# Altium PCB WX0.012.445-4.1.PcbDoc
Units mil, origin at the board's own origin, x right, y up, seen from the top; angles counter-clockwise.
Board outline 2410.03 x 1540.03 mil, 2 copper layers (Top Layer, Bottom Layer); 4 components, 13 nets, 38 pads, 111 vias.
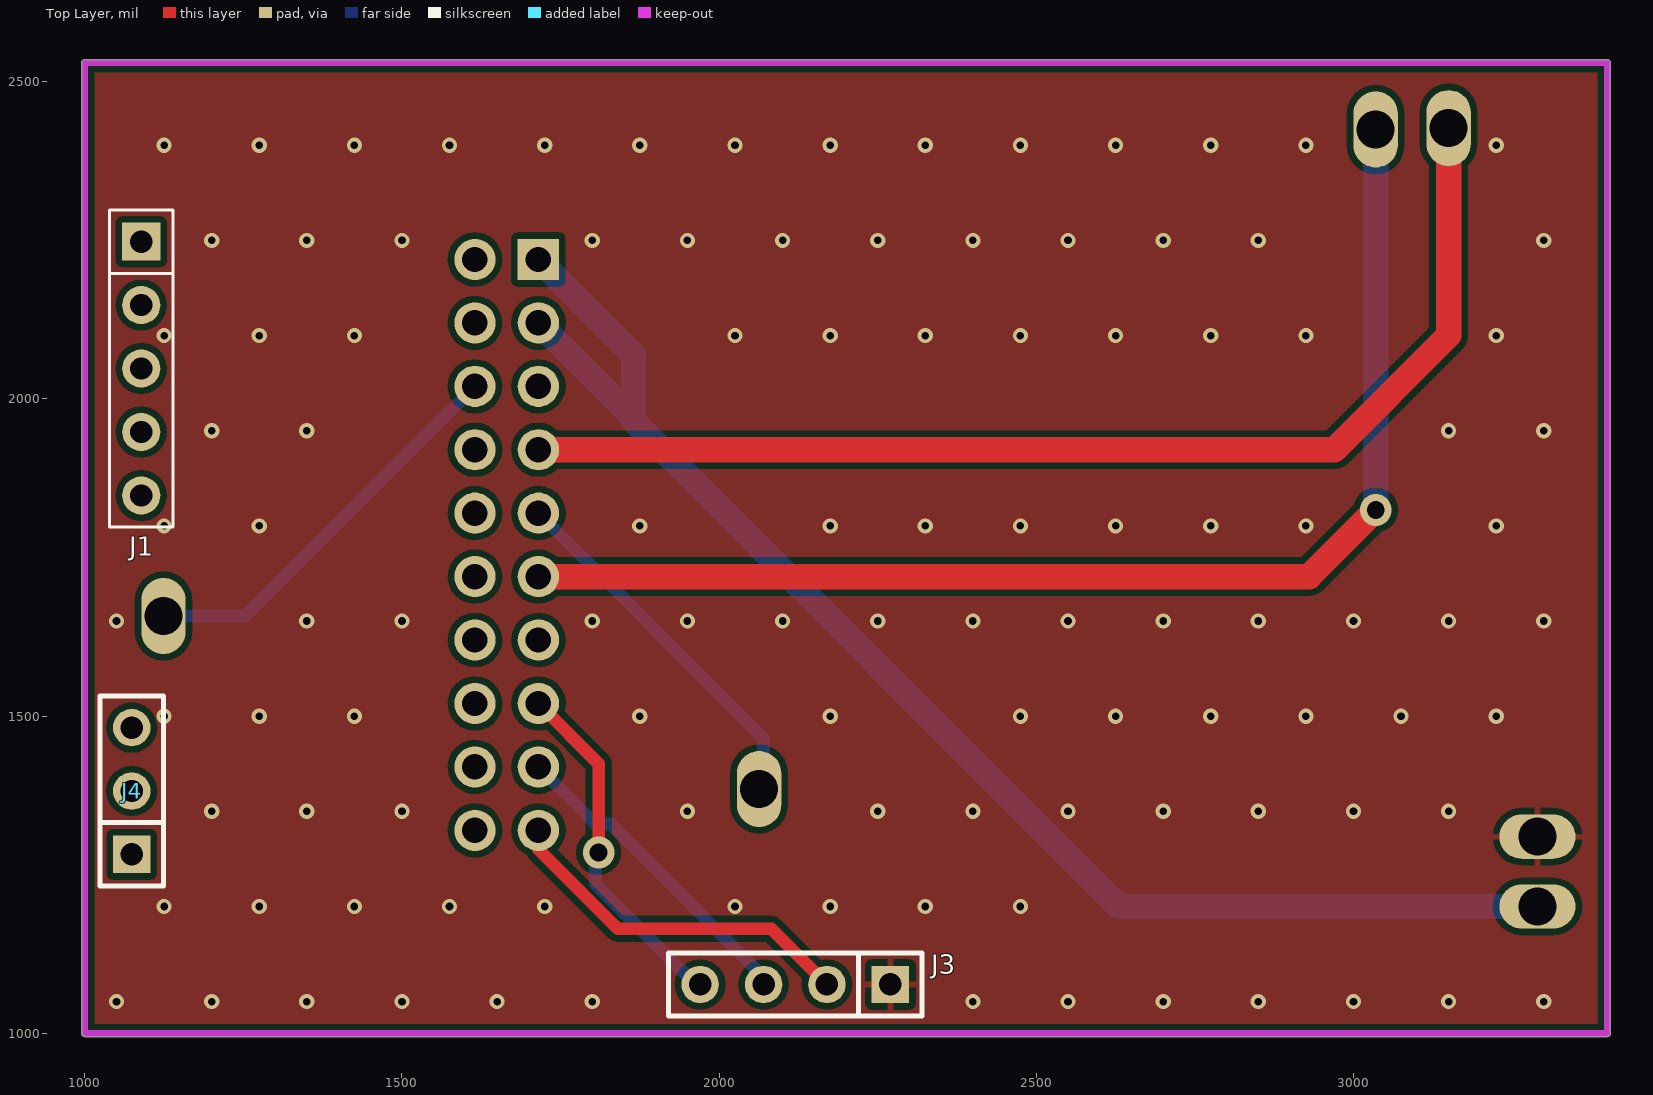
[diagram p0: Top Layer view]
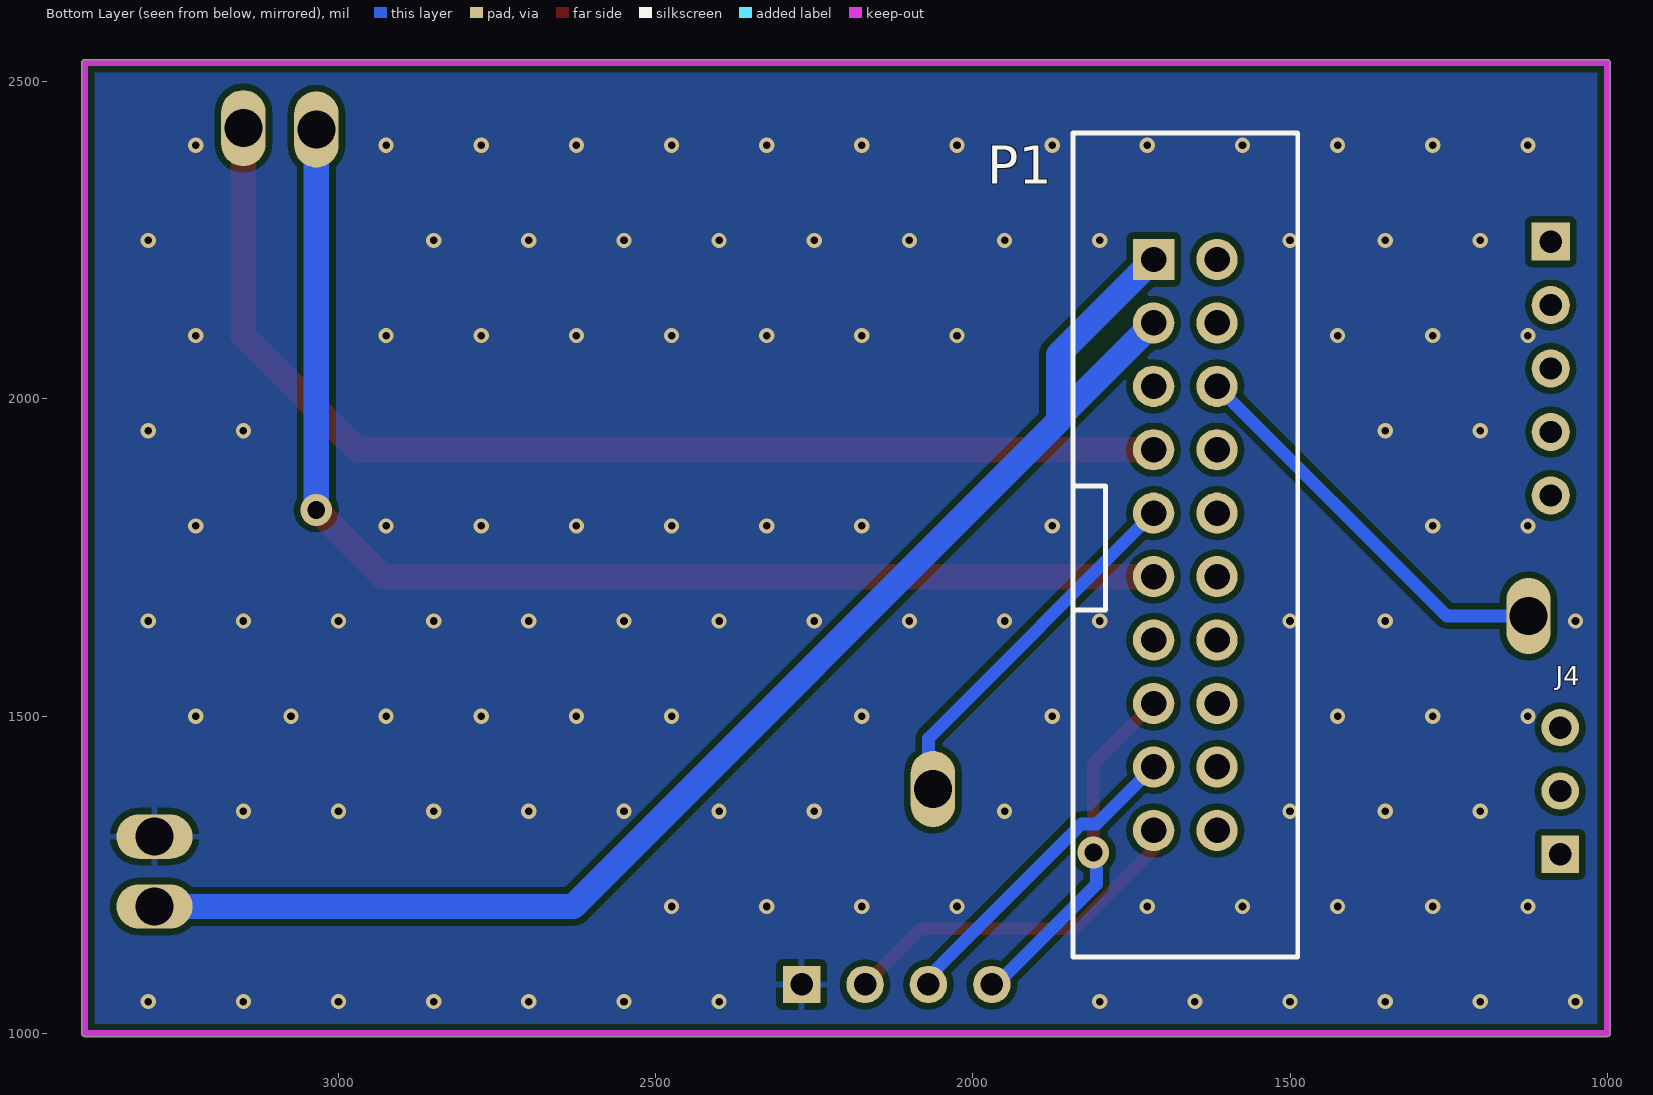
[diagram p1: Bottom Layer view, seen from below]

## Layer stack, top to bottom
Top Solder: solder mask 0.4, Solder Resist, Dk 3.5
Top Layer: signal copper 1.4
Dielectric 1: dielectric 12.6, FR-4, Dk 4.8
Bottom Layer: signal copper 1.4
Bottom Solder: solder mask 0.4, Solder Resist, Dk 3.5

## Board outline
1000,994.99 cw(c1000,1000) 994.99,1000 994.99,2530 cw(c1000,2530) 1000,2535.01 3400,2535.01 cw(c3400,2530) 3405.01,2530 3405.01,1000 cw(c3400,1000) 3400,994.99

## Design rules (kind name [scope] priority, off if disabled: settings)
Clearance [All] p1: gap=10 ignorepadtopadclearanceinfootprint=FALSE except(0: Arc-Hole Track-Hole SMDPad-Hole THPad-Hole Via-Hole Fill-Hole Poly-Hole Region-Hole Text-Hole)
PolygonConnect [All] p1: connectstyle=Relief reliefconductorwidth=10 reliefentries=4 polygonreliefangle="90 Angle" airgapwidth=10
RoutingVias [All] p1: holewidth=28 width=50 viastyle="Through Hole" minholewidth=28 minwidth=50 maxholewidth=28 maxwidth=50
SolderMaskExpansion [All] p1: expansion=4
Width [All] p1: maxlimit=50 minlimit=10 preferedwidth=10
30 further rules are at their usual default settings.

## Components (designator, comment, footprint, x,y, rotation, side; value= is the part's Value field where it differs from the comment)
J1 "PIN254_1*5*WXHJ" PIN254_1*5SR 1089,2248 r270 top
J3 "PIN254_1*4*WXHJ" PIN254_1*4*1100S 2270,1077 r180 top (schematic designator J2)
J4 "PIN254_1*3" PIN254_1*3*WXHJ 1074.01,1282.01 r90 top (schematic designator J3)
P1 "" PHD254_2X10P 1665,1770 r180 bottom

## Footprints (in the part's own frame and the unit in brackets; to place one, negate y for a bottom-side part, rotate by r counter-clockwise, add the part's x,y. Pads: shape width x height; smd on the part's side, far side on the other; paste and mask are expansions set on the pad)
PHD254_2X10P [mil]
  rect 65x65 hole 40: 1(-50,450)
  round 65 hole 40: 2(50,450) 3(-50,350) 4(50,350) 5(-50,250) 6(50,250) 7(-50,150) 8(50,150) 9(-50,50) 10(50,50) 11(-50,-50) 12(50,-50) 13(-50,-150) 14(50,-150) 15(-50,-250) 16(50,-250) 17(-50,-350) 18(50,-350) 19(-50,-450) 20(50,-450)
  silkscreen extent -177,-650 177,650
PIN254_1*3*WXHJ [mm]
  rect 1.5x1.5 hole 0.9: 1(0,0)
  round 1.5 hole 0.9: 2(2.54,0) 3(5.08,0)
  silkscreen extent -1.27,-1.27 6.35,1.27
PIN254_1*4*1100S [mm] "Connector; Header; 4 Position"
  rect 1.5x1.5 hole 0.9: 1(0,0)
  round 1.5 hole 0.9: 2(2.54,0) 3(5.08,0) 4(7.62,0)
  silkscreen extent -1.27,-1.27 8.89,1.27, body extent -1.3,-1.3 8.86,1.24, height 8.54
PIN254_1*5SR [mil]
  rect 60x60 hole 35: 1(0,0)
  round 60 hole 35: 2(100,0) 3(200,0) 4(300,0) 5(400,0)
  silkscreen extent -50,-50 450,50

## Part data
J1: library part AD_WXHJ_PinHeader_02, "1*5 ，Φ1.0 ，2.54mm，直脚,无需焊接器件"
J3: library part AD_WXHJ_PinHeader_01, "1*4 ，Φ1.0 ，2.54mm，直脚,无需焊接器件"
P1: library part "Header 10X2  PASS", "Header, 10-Pin, Dual row"

## Free pads (board coordinates)
  oval 70x120 hole 60: TP1(1124,1658) TP2(2063,1385) TP3(3035,2425) TP4(3150,2427)
  oval 120x70 hole 60: TP5(3290,1310) TP6(3290,1200)

## Via types
v1: diameter 24, hole 12, Top Layer to Bottom Layer, tented both sides, 109 vias
v2: diameter 50, hole 28, Top Layer to Bottom Layer, 2 vias

## Nets (pads, with @x,y where several pads share a name; then routed paths per layer and width w, separated by ;. In a path a pad name is that pad's centre, name@x,y a point inside that pad or via, vN(x,y) a via of type N, cw(c..) or ccw(c..) an arc to the next point about the centre after c; other vN are vias at no path point)
anjian1: P1.6 pad.TP1 | length 656.1
  Bottom Layer w20: pad.TP1@1120,1685 1147,1658 1253,1658 P1.6
DY_SY_V2: P1.7 pad.TP4 | length 1829.6
  Top Layer w40: P1.7 2970,1920 3150,2100 pad.TP4@3150,2420
DY_SY_V3: P1.11 pad.TP3 | length 1959
  Top Layer w10: pad.TP3@3030.38,2418.08 3032.69,2416.54 pad.TP3@3035,2415
  Top Layer w40: P1.11 2930,1720 v2(3035,1825)
  Bottom Layer w40: v2(3035,1825) pad.TP3@3035,2415
GND: J3.1 pad.TP5
  other v1: 1050,1050 1200,1050 1350,1050 1500,1050 1650,1050 1800,1050 2400,1050 2550,1050 2700,1050 2850,1050 3000,1050 3150,1050 3300,1050 1125,1200 1275,1200 1425,1200 1575,1200 1725,1200 2025,1200 2175,1200 2325,1200 2475,1200 1200,1350 1350,1350 1500,1350 1950,1350 2250,1350 2400,1350 2550,1350 2700,1350 2850,1350 3000,1350 3150,1350 1125,1500 1275,1500 1425,1500 1875,1500 2175,1500 2475,1500 2625,1500 2775,1500 2925,1500 3075,1500 3225,1500 1050,1650 1350,1650 1500,1650 1800,1650 1950,1650 2100,1650 2250,1650 2400,1650 2550,1650 2700,1650 2850,1650 3000,1650 3150,1650 3300,1650 1125,1800 1275,1800 1875,1800 2175,1800 2325,1800 2475,1800 2625,1800 2775,1800 2925,1800 3225,1800 1200,1950 1350,1950 3150,1950 3300,1950 1125,2100 1275,2100 1425,2100 2025,2100 2175,2100 2325,2100 2475,2100 2625,2100 2775,2100 2925,2100 3225,2100 1200,2250 1350,2250 1500,2250 1800,2250 1950,2250 2100,2250 2250,2250 2400,2250 2550,2250 2700,2250 2850,2250 3300,2250 1125,2400 1275,2400 1425,2400 1575,2400 1725,2400 1875,2400 2025,2400 2175,2400 2325,2400 2475,2400 2625,2400 2775,2400 2925,2400 3225,2400
RXD: J3.3 P1.17 | length 494.6
  Bottom Layer w10: J3.3@2063.64,1095 J3.3@2075,1095
  Bottom Layer w20: P1.17 1805,1330 1828.64,1330 J3.3@2063.64,1095
SET: J3.4 P1.15 | length 561.8
  Top Layer w20: P1.15 1810,1425 ; v2(1810,1285) 1810,1420
  Bottom Layer w10: 1805,1260 1805,1280 v2(1810,1285) ; J3.4@1960,1080 J3.4@1975,1095
  Bottom Layer w20: 1805,1260 1805,1235 J3.4@1960,1080
tianxian0: 
tianxian1: 
txd: J3.2 P1.19 | length 570.8
  Top Layer w10: P1.19@1715,1290 P1.19 ; J3.2@2152,1095 J3.2@2175,1095
  Top Layer w20: P1.19@1715,1290 1840,1165 2082,1165 J3.2@2152,1095
USB_GD: 
VCC_3.3V: P1.9 pad.TP2 | length 584.9
  Bottom Layer w10: pad.TP2 pad.TP2@2070,1392
  Bottom Layer w20: P1.9 2070,1465 pad.TP2@2070,1392
VDD_3.8V: 
VIN_5V: P1.1 P1.3 pad.TP6 | length 2226.1
  Bottom Layer w10: 1865,1965 1865,1970
  Bottom Layer w40: P1.3 1865,1970 1865,2070 P1.1 ; 1865,1965 2630,1200 pad.TP6@3245,1200
pads on no net: J1.1 J1.2 J1.3 J1.4 J1.5 J4.1 J4.2 J4.3 P1.2 P1.4 P1.5 P1.8 P1.10 P1.12 P1.13 P1.14 P1.16 P1.18 P1.20

## Polygon pours and split planes (outlines as drawn)
GND on Bottom Layer "Bottom Layer-No Net" (solid, pour order 28): 1000,1000 1005,1005 3405,1005 3405,2525 3400,2530 1000,2530
GND on Top Layer "Bottom Layer-No Net" (solid, pour order 30): 1000,1010 3390,1010 3390,2515 3400,2525 3395,2530 1000,2530

## Keep-outs
Keep-Out Layer:
  lines w10: 1000,1000 3400,1000 3400,2530 1000,2530 1000,1000